# EAGLE board ftdi2updi (EAGLE 9.6.2)
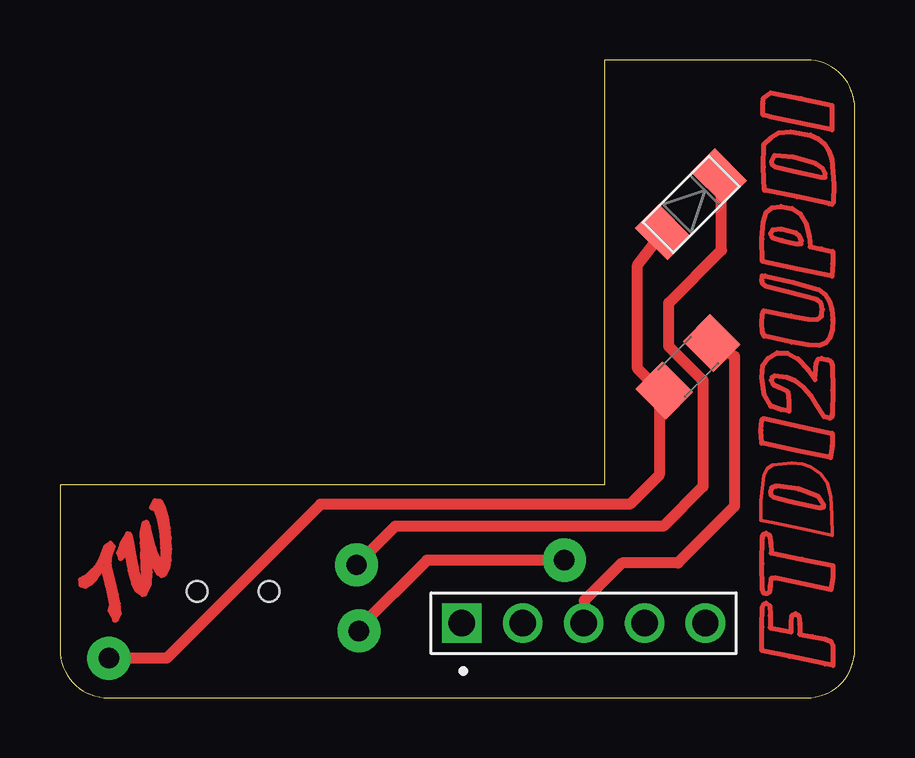
[diagram p0: board, top side]
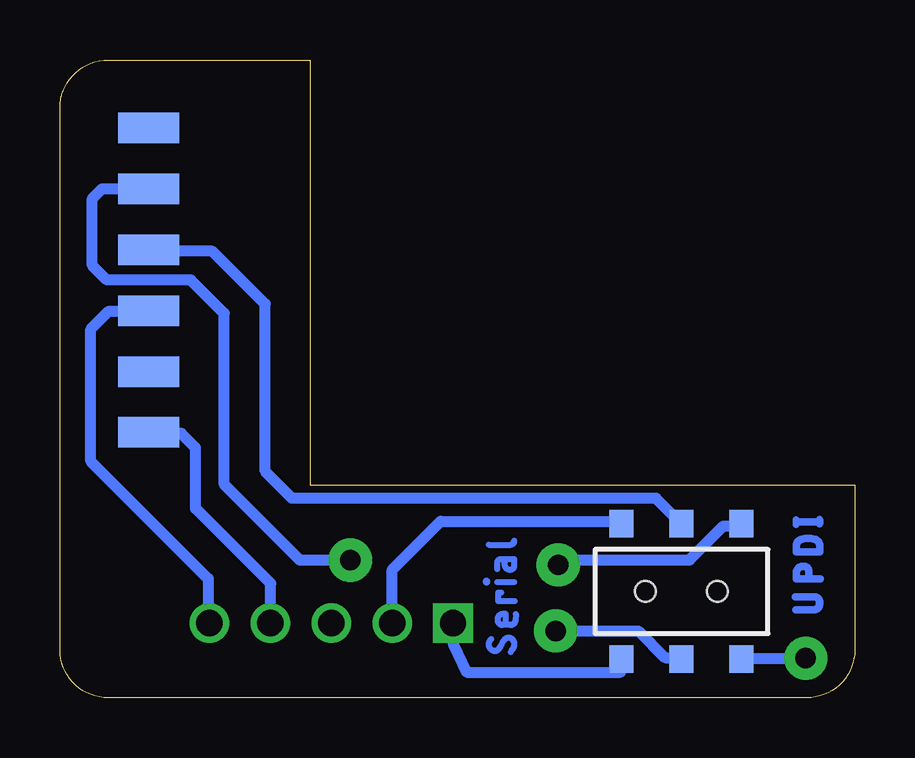
[diagram p1: board, bottom side, seen from below]

Size 33.13 x 26.59 mm. Coordinates in mm from the lower left corner, seen from the top.
Outline: 22.7,26.59 22.7,8.87 0,8.87 0,2 arc90 2,0 31.13,0 arc90 33.13,2 33.13,24.59 arc90 31.13,26.59 22.7,26.59
Copper layers (1*16): Top 0.035mm / dielectric 1.5mm / Bottom 0.035mm
Design rules "default": minimum track width 6mil, minimum drill 0.35mm, track to track 6mil, track to pad 6mil, pad to pad 6mil, via to via 6mil, smd to smd 6mil, copper to edge 40mil, drill to drill 6mil, minimum pad ring 10mil, minimum via ring 8mil, stop-mask expansion 4mil, vias tented up to drill 0mil, thermal gap 10mil
Net classes: 0 default: width 0.457 mm

## Footprints (pad centres in the part's own frame; a part is rotated, then mirrored left to right if it is on the bottom)
MINI-SMA = smd 1.4 x 1.9: ANODE 1.65,0; KATHODE -1.65,0
61300511121 = drill 1.1 square: 1 -5.08,0 | drill 1.1: 2 -2.54,0; 3 0,0; 4 2.54,0; 5 5.08,0
1206 = smd 1.6 x 1.8: 1 -1.4,0; 2 1.4,0
SWITCH_DPDT_SMD_AYZ0202 = smd 1 x 1.15: 1 -2.5,2.825; 2 0,2.825; 3 2.5,2.825; 4 -2.5,-2.825; 5 0,-2.825; 6 2.5,-2.825 | hole 0.85: 1.5,0; -1.5,0
1X06SMD = smd 2.54 x 1.27: 1 0,6.35; 2 0,3.81; 3 0,1.27; 4 0,-1.27; 5 0,-3.81; 6 0,-6.35

## Placement (x,y rotation side)
D1  SCHOTTKY  [MINI-SMA]  26.31,20.57 225 top
J2  61300511121  [61300511121]  21.83,3.11 0 top
R2  470  [1206]  26.18,13.8 45 top
S1  [SWITCH_DPDT_SMD_AYZ0202]  7.22,4.43 0 bottom
U$1  CONN_06_FTDI-SMD-HEADER  [1X06SMD]  29.43,17.41 0 bottom

## Library data of the parts
D1 = eagle_fab
J2 = Headers; CREATED_BY: PCBLayout.com; DIGI_KEY_PART_NUMBER: 732-5318-ND; MANUFACTURER: Wurth Electronics Inc.; MPN: 61300511121
R2 = 01_SparkFun
S1 = SparkFun-Switches; PROD_ID: SWCH-08179; SF_SKU: COM-00597
U$1 = fab_new

## Nets
N$1: S1.2
N$2: S1.5
N$3: D1.ANODE R2.1 S1.6
N$11: S1.3
RX: J2.1 S1.4
S$1: U$1.1
S$3: D1.KATHODE
TX: J2.2 S1.1
UPDI: R2.2

## Tracks (layer width: path | path; a pad name or v marks a point on that pad's centre or on a via)
GND
  Bottom 0.457: 24.35,2.94 24.35,4.77 27.48,7.89 27.48,10.42 28.08,11.02 29.58,11.02
N$1
  Bottom 0.457: S1.2 8.29,8.32 23.46,8.32 24.58,9.44 24.58,16.42 26.78,18.62 29.58,18.62
N$2  (via drill 0.85 pad 1.8)
  Top 0.457: v12.46,2.78 12.46,2.91 15.29,5.74 v21.03,5.74
  Bottom 0.457: v12.46,2.78 9.03,2.78 7.91,1.67 7.3,1.67 S1.5 | v21.03,5.74 23.13,5.74 26.28,8.89 26.28,16.02 27.68,17.42 31.18,17.42 31.78,18.02 31.78,20.82 31.38,21.22 29.28,21.22
N$3  (via drill 0.85 pad 1.8)
  Top 0.457: v2.04,1.65 4.45,1.65 10.86,8.06 23.75,8.06 24.98,9.29 24.98,12.51 R2.1 24.98,12.82 24.07,13.72 24.07,18.05 D1.ANODE
  Bottom 0.457: S1.6 4.68,1.65 v2.04,1.65
N$5
  Top 0.203: 31.9,1.41 30.42,1.72 29.26,1.97 29.26,2.95 29.29,3.79 29.34,3.91 29.44,3.94 29.58,3.85 29.61,3.43 29.61,2.92 30.05,2.83 30.48,2.74 30.48,3.12 30.52,3.43 30.66,3.5 30.8,3.43 30.83,3.08 30.83,2.65 31.38,2.55 31.89,2.45 32.14,2.35 32.22,2.18 32.23,1.85 32.23,1.35 31.9,1.41
N$6
  Top 0.203: 32.14,4.51 29.81,4.99 29.65,4.97 29.61,4.68 29.58,4.4 29.44,4.33 29.34,4.36 29.29,4.51 29.26,5.6 29.29,6.68 29.34,6.83 29.43,6.86 29.58,6.78 29.63,6.45 29.66,6.04 30.94,5.78 32.23,5.51 32.23,5.01 32.14,4.51
N$7
  Top 0.152: 31.26,6.98 29.77,7.28 29.23,7.39 29.23,8.2 29.34,9.26 29.49,9.55 29.71,9.71 30.51,9.79 30.96,9.74 31.3,9.63 31.72,9.34 32,8.95 32.14,8.39 32.19,7.61 32.19,6.77 31.26,6.98
N$8
  Top 0.203: 31.62,8.39 30.79,8.7 29.87,8.82 29.67,8.76 29.62,8.58 29.64,8.46 29.74,8.37 30.45,8.18 31.69,7.93 31.83,7.95 31.84,8.05 31.62,8.39
N$9
  Top 0.203: 32.12,10.01 30.66,10.32 29.26,10.62 29.23,11.15 29.26,11.58 29.3,11.64 29.38,11.63 30.86,11.31 32.19,11.02 32.19,10.52 32.12,10.01
N$10
  Top 0.203: 32.08,11.66 31.86,11.71 31.55,12.19 31.31,12.6 31,12.94 30.66,13.21 30.3,13.36 29.8,13.43 29.68,13.36 29.65,13.23 29.73,13.07 30.02,12.93 30.34,12.76 30.39,12.38 30.39,11.95 30.06,12.01 29.63,12.16 29.36,12.63 29.25,13.36 29.3,13.85 29.51,14.15 29.89,14.38 30.33,14.37 30.77,14.13 31.19,13.66 31.48,13.26 31.5,13.7 31.53,13.98 31.61,14.12 31.76,14.15 32.02,14.09 32.13,14.04 32.19,13.88 32.22,12.82 32.19,11.82 32.15,11.67 32.08,11.66
N$11  (via drill 0.85 pad 1.8)
  Top 0.457: v12.36,5.54 13.97,7.15 25.16,7.15 26.81,8.8 26.81,13.23 25.38,14.65 25.38,16.47 27.58,18.66 27.58,21.62
  Bottom 0.152: 4.86,7.16 S1.3
  Bottom 0.457: 4.86,7.16 5.47,7.16 6.89,5.74 12.16,5.74 v12.36,5.54
N$12
  Top 0.203: 32.1,15.01 31.93,14.79 31.65,14.69 31.19,14.71 30.49,14.83 29.36,15.07 29.29,15.26 29.25,15.63 29.27,15.98 29.34,16.14 30.48,15.92 31.18,15.78 31.57,15.77 31.74,15.9 31.78,16.19 31.74,16.43 31.55,16.6 30.34,16.92 29.43,17.15 29.3,17.25 29.27,17.39 29.28,17.58 29.4,17.59 30.54,17.33 31.64,17.01 31.9,16.82 32.07,16.55 32.17,16.2 32.21,15.76 32.19,15.33 32.1,15.01
N$13
  Top 0.203: 32.18,17.58 30.74,17.88 29.28,18.19 29.27,19.14 29.32,19.84 29.44,20.24 29.67,20.43 30.07,20.48 30.53,20.4 30.87,20.17 31.1,19.78 31.23,19.23 31.28,18.8 31.75,18.71 32.21,18.61 32.21,18.09 32.18,17.58
N$14
  Top 0.2: 1.96,4.77 1.98,4.65 2.08,4.23 2.16,3.81 2.12,3.78 2.08,3.63 2.28,3.25 2.35,3.25 2.48,3.52 2.43,3.92 2.35,4.32 2.25,4.72 2.19,4.97
N$15
  Top 0.2: 1.96,4.77 1.89,5.04 1.78,5.43 1.67,5.27 1.48,5 1.25,4.77 1.07,4.65 0.88,4.7 0.87,4.79 0.86,4.92 0.96,4.99 1.16,5.07 1.39,5.31 1.59,5.57 1.73,5.81 1.82,6.07 1.91,6.3 2.11,6.44 2.22,6.31 2.09,5.95 2.06,5.54 2.15,5.13 2.19,4.97
N$16
  Top 0.2: 3.17,5.51 3.24,5.17 3.43,4.72 3.46,5.03 3.44,6.02
N$17
  Top 0.2: 3.17,5.51 3.15,5.61 3.07,6.05 3,6.43 2.92,6.8 2.82,6.84 2.58,6.43 2.53,6.23 2.44,6.03 2.53,5.81 2.75,6.03 2.78,6.11 2.83,5.84 2.87,5.57 2.92,5.31
N$18
  Top 0.2: 4.27,6.44 4.28,6.26 4.27,5.84 4.19,5.6 4.01,5.97
N$19
  Top 0.2: 4.27,6.44 4.26,6.69 4.2,7.11 4.12,7.53 3.98,7.91 3.91,7.93 3.85,7.91 3.82,7.94 3.95,8.21 4.19,8.18 4.32,7.95 4.44,7.52 4.52,7.08 4.56,6.68
N$20
  Top 0.2: 2.92,5.31 2.95,5.16 3.06,4.76 3.2,4.48 3.44,4.31 3.54,4.32 3.73,4.75 3.76,5.23 3.74,5.72 3.77,5.84 3.9,5.5 4.1,5.19 4.23,5.1 4.35,5.15 4.5,5.43 4.55,5.75 4.57,6.19 4.56,6.64 4.56,6.68
N$21
  Top 0.2: 3.99,5.99 3.91,6.25 3.77,6.75 3.68,7.15 3.61,7.33 3.49,7.28 3.41,6.87 3.42,6.44 3.44,6.05
N$22
  Top 0.2: 1.03,4.83 1.17,4.89 1.35,5.07 1.52,5.28 1.71,5.5 1.9,5.8 1.97,5.97 2.07,6.24 1.9,5.43 2.02,5.08 2.14,4.69 2.23,4.28 2.29,3.96 2.32,3.68 2.26,3.67 2.31,3.54 2.31,3.45 2.41,3.6
N$23
  Top 0.2: 2.57,6.01 2.65,6.15 2.69,6.31 2.84,6.58 2.89,6.36 2.83,6.22 2.89,6.09 2.99,5.78 3.02,5.43 3.14,4.99 3.32,4.61 3.47,4.49 3.53,4.62 3.61,4.91 3.64,5.23 3.63,5.45 3.62,5.84 3.59,6.18 3.57,6.47 3.56,6.69 3.58,6.9 3.58,7.08 3.7,6.55 3.73,6.37 3.77,6.11 3.78,5.92 3.85,5.93 3.95,5.73 4.1,5.5 4.19,5.38 4.25,5.26 4.25,5.44 4.33,5.45 4.33,5.53 4.41,5.72 4.43,5.86 4.45,6.23 4.42,6.48 4.38,6.97 4.29,7.41 4.25,7.67 4.18,7.86 4.12,8.01 4.02,8.04
N$24
  Bottom 0.32: 15.35,4.84 15.35,4.85
N$25
  Bottom 0.25: 14.91,4.83 14.2,4.83
N$26
  Bottom 0.25: 14.74,4.38 14.87,4.38 14.87,4.03 14.18,4.03
N$27
  Bottom 0.25: 14.9,5.37 14.9,5.63 arc100 14.72,5.78 14.2,5.78 | 14.2,5.78 14.19,5.78 | 14.2,5.78 14.2,5.5 arc90 14.37,5.33 arc85 14.59,5.53 arc11 14.59,5.73
N$28
  Bottom 0.25: 15.25,6.38 14.35,6.38 arc-97 14.2,6.55
N$29
  Bottom 0.25: 14.13,3.49 14.14,3.24 arc93 14.37,3.03
N$30
  Bottom 0.25: 14.36,3.03 14.69,3.03
N$31
  Bottom 0.25: 14.54,3.04 14.54,3.49 14.66,3.49 arc-85 14.89,3.28 arc-74 14.74,3.04
N$32
  Bottom 0.25: 14.34,1.91 14.26,2.02 arc-54 14.21,2.34 arc-66 14.41,2.5 arc-50 14.58,2.44 arc-21 14.72,2.24 arc9 14.83,2.04 arc85 15.1,1.97 arc42 15.24,2.13 arc69 15.16,2.44
N$33
  Bottom 0.32: 2.45,3.67 1.69,3.67 arc-102 1.47,3.94
N$34
  Bottom 0.32: 2.47,4.21 1.68,4.21 arc106 1.47,3.93
N$35
  Bottom 0.32: 1.44,4.96 2.43,4.96 | 2.43,4.96 2.44,4.96 | 2.43,4.96 2.43,5.21 arc59 2.3,5.44 arc41 2.09,5.48 arc71 1.92,5.31 arc15 1.91,5
N$36
  Bottom 0.32: 2.44,6.1 2.44,6.08 1.47,6.08
N$37
  Bottom 0.32: 2.43,6.09 2.43,6.34 arc39 2.37,6.51 arc38 2.21,6.61
N$38
  Bottom 0.32: 1.45,6.07 1.45,6.31 arc-39 1.52,6.51 arc-35 1.67,6.61 arc-32 2.22,6.61
N$39
  Bottom 0.32: 2.44,7.34 1.46,7.34 1.46,7.33
N$40
  Bottom 0.3: 1.46,7.44 1.46,7.23
N$41
  Bottom 0.3: 2.44,7.43 2.44,7.22
N$42
  Top 0.203: 30.68,19.38 30.05,19.53 29.71,19.5 29.62,19.36 29.69,19.19 30.1,19.07 30.76,18.92 30.89,18.93 30.91,19.06 30.84,19.22 30.68,19.38
N$43
  Top 0.203: 32.07,20.59 30.72,20.89 29.37,21.16 29.32,22.13 29.35,23.09 29.64,23.34 29.96,23.56 30.46,23.6 31.28,23.46 31.61,23.3 31.86,23.09 32.04,22.82 32.17,22.46 32.27,21.4 32.24,20.66 32.19,20.58 32.07,20.59
N$44
  Top 0.203: 31.5,22.26 30.57,22.54 29.78,22.61 29.66,22.35 29.68,22.24 29.8,22.15 30.59,21.95 31.73,21.71 31.9,21.71 31.91,21.87 31.79,22.07 31.5,22.26
N$45
  Top 0.203: 32.18,23.69 29.64,24.22 29.31,24.3 29.31,24.78 29.33,25.01
N$46
  Top 0.203: 32.18,23.69 32.18,24.71 30.9,24.98 29.63,25.22 29.34,25.01
RX
  Bottom 0.457: S1.4 9.76,1.07 16.18,1.07 16.75,2.25 J2.1
S$1
  Bottom 0.457: U$1.1 29.53,23.86
S$3
  Top 0.457: 27.42,21.94 D1.KATHODE
TX
  Bottom 0.457: J2.2 19.29,5.34 17.26,7.36 9.73,7.36 S1.1
UPDI
  Top 0.457: R2.2 28.12,14.24 28.12,7.98 25.76,5.62 23.43,5.62 21.86,4.05 21.86,3.18
VCC
  Bottom 0.457: 26.95,2.94 26.95,4.97 31.85,9.86 31.85,15.37 31.09,16.12 28.58,16.12